# Altium PCB PCB1.PcbDoc
Units mm, origin at the board's own origin, x right, y up, seen from the top; angles counter-clockwise.
Board outline 25.02 x 27.43 mm, 2 copper layers (Top Layer, Bottom Layer); 8 components, 6 nets, 23 pads, 0 vias.
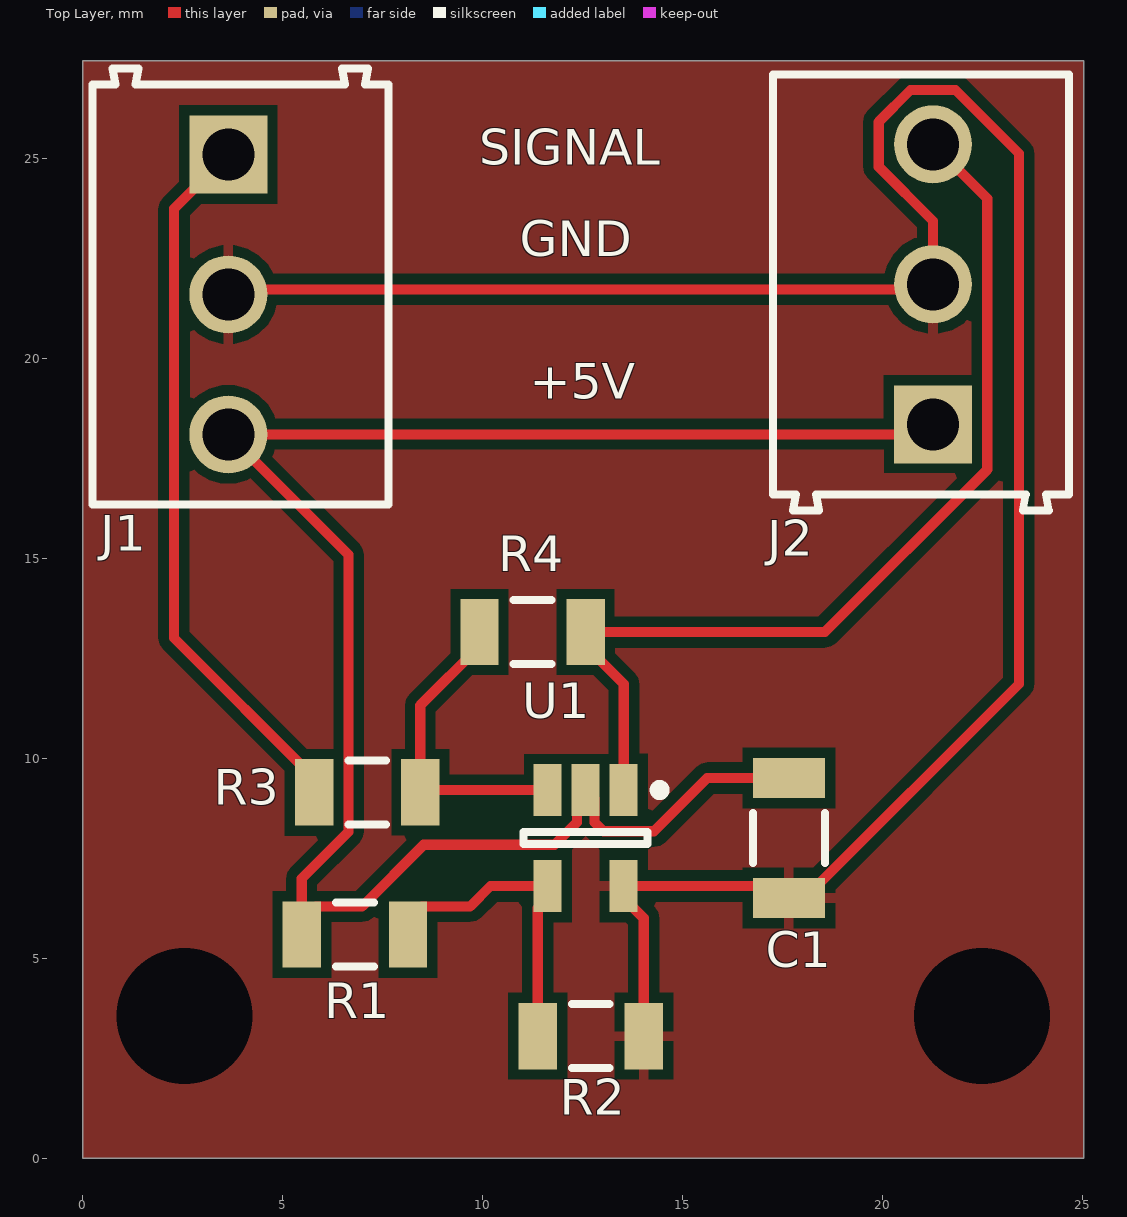
[diagram p0: Top Layer view]
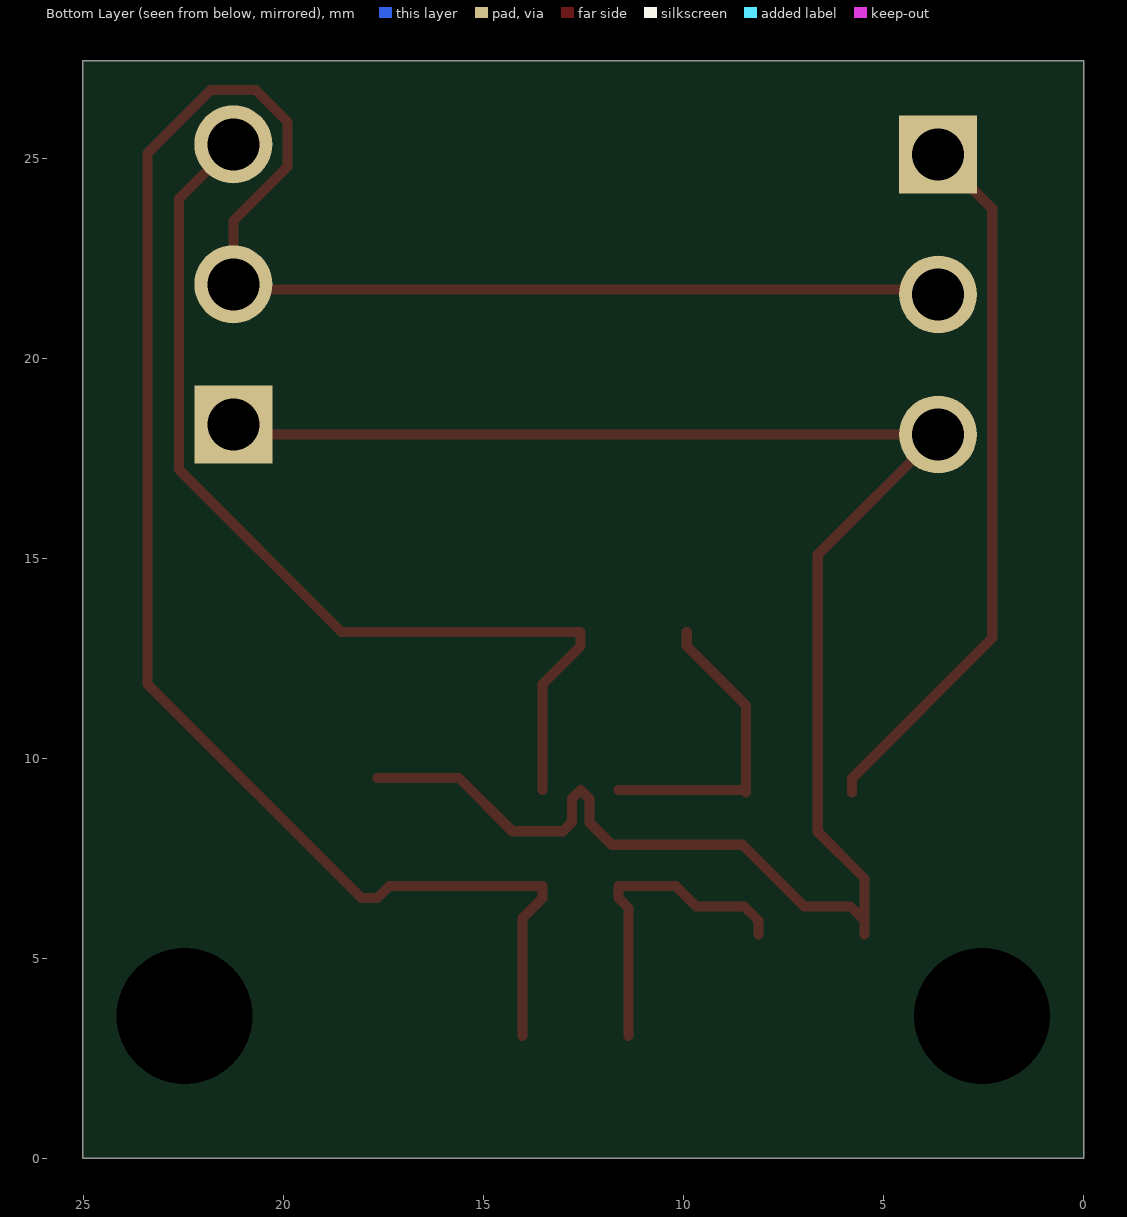
[diagram p1: Bottom Layer view, seen from below]
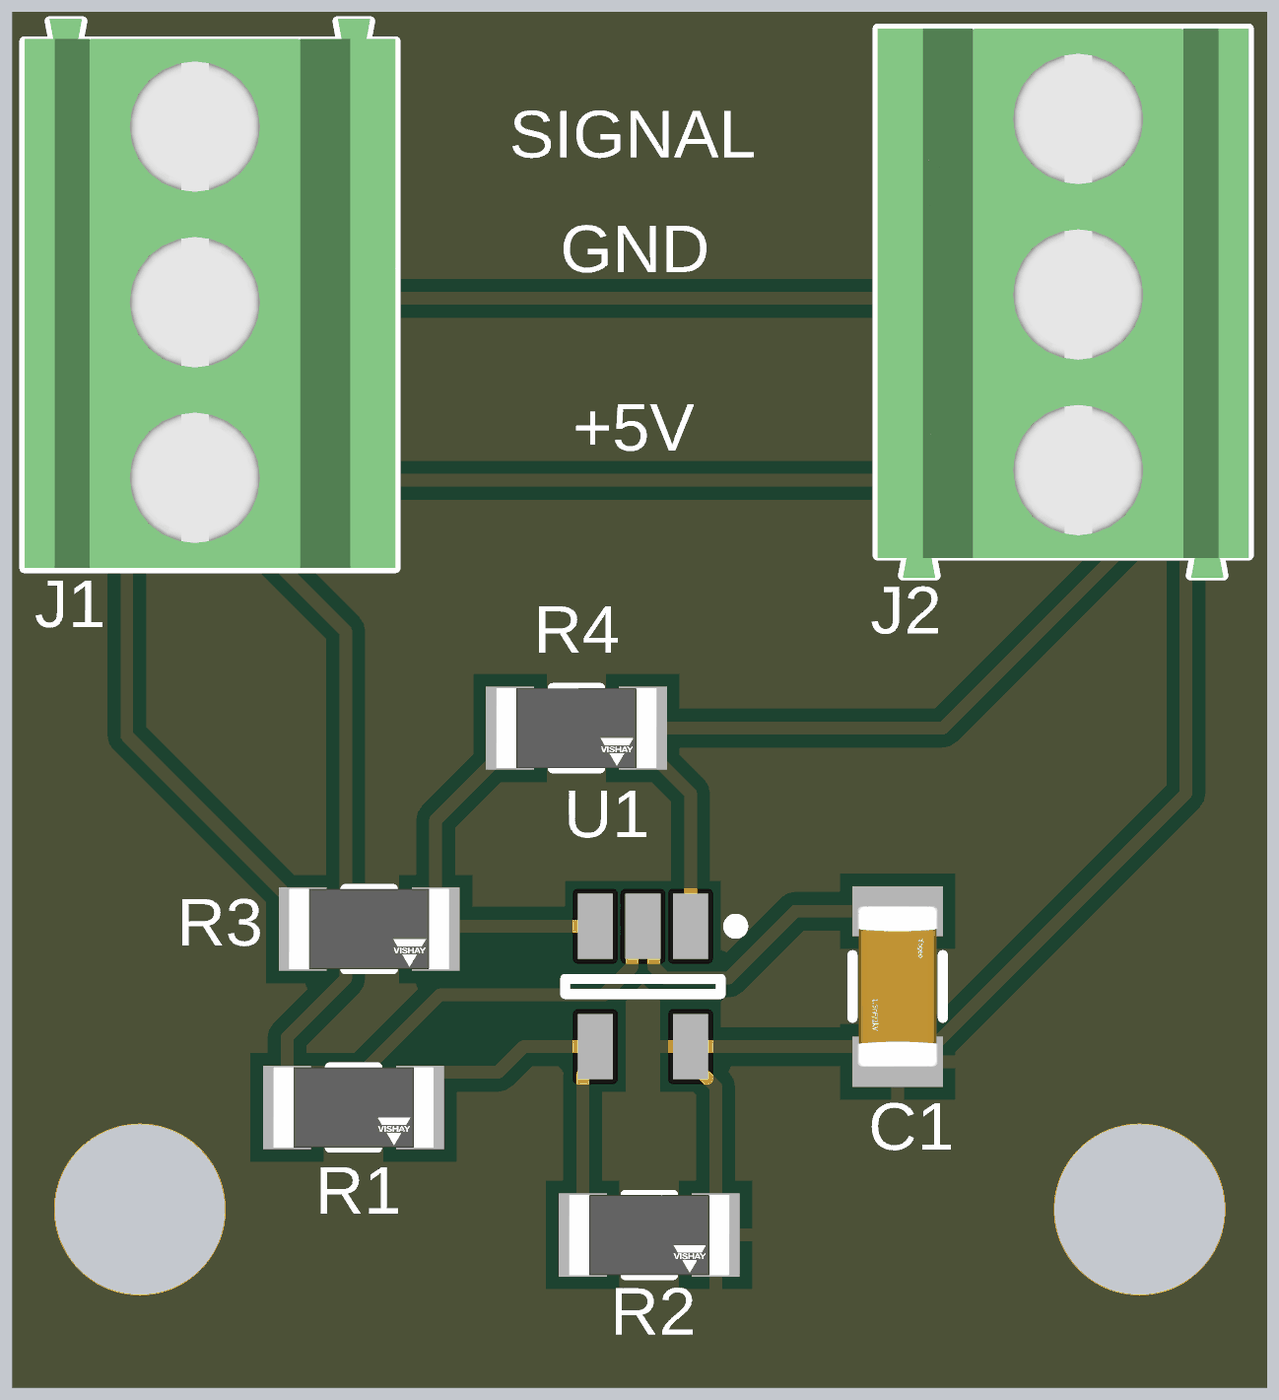
[diagram p2: 3D render of the assembled board from above, using the file's embedded part models]

## Layer stack, top to bottom
Top Solder: solder mask 0.0102, Solder Resist, Dk 3.5
Top Layer: signal copper 0.0356
Dielectric 1: dielectric 0.32, FR-4, Dk 4.8
Bottom Layer: signal copper 0.0356
Bottom Solder: solder mask 0.0102, Solder Resist, Dk 3.5

## Board outline
0,0 25.019,0 25.019,27.432 0,27.432

## Design rules (kind name [scope] priority, off if disabled: settings)
Clearance [All] p1: gap=0.254 ignorepadtopadclearanceinfootprint=FALSE except(0: Arc-Hole Track-Hole SMDPad-Hole THPad-Hole Via-Hole Fill-Hole Poly-Hole Region-Hole Text-Hole)
PolygonConnect [All] p1: connectstyle=Relief reliefconductorwidth=0.254 reliefentries=4 polygonreliefangle="90 Angle" airgapwidth=0.254
RoutingVias [All] p1: holewidth=0.711 width=1.27 viastyle="Through Hole" minholewidth=0.711 minwidth=1.27 maxholewidth=0.711 maxwidth=1.27
SolderMaskExpansion [All] p1: expansion=0.102 istentingtop=FALSE
Width [All] p1: maxlimit=0.254 minlimit=0.254 preferedwidth=0.254
30 further rules are at their usual default settings.

## Components (designator, comment, footprint, x,y, rotation, side; value= is the part's Value field where it differs from the comment)
C1 "10uF" FP-CC1206-1_25-MFG 17.653,8.001 r270 top value="100 nF"
J1 "691214110003" 691214110003 3.937,21.59 r270 top
J2 "691214110003" 691214110003 20.955,21.844 r90 top
R1 "680" FP-CRCW1206-e3-IPC_C 6.802,5.588 r0 top
R2 "1K" FP-CRCW1206-e3-IPC_C 12.7,3.048 r0 top
R3 "1K" FP-CRCW1206-e3-IPC_C 7.112,9.144 r0 top
R4 "10K" FP-CRCW1206-e3-IPC_C 11.247,13.151 r0 top
U1 "MCP6541RT-E/OT" SOT-23-OT5_M 12.573,8.001 r270 top

## Footprints (in the part's own frame and the unit in brackets; to place one, negate y for a bottom-side part, rotate by r counter-clockwise, add the part's x,y. Pads: shape width x height; smd on the part's side, far side on the other; paste and mask are expansions set on the pad)
691214110003 [mm] "3.50 mm Horizontal Entry Modular, 3p"
  rect 1.95x1.95 hole 1.3: 1(-3.5,-0.3)
  round 1.95 hole 1.3: 2(0,-0.3) 3(3.5,-0.3)
  silkscreen extent -5.65,-3.7 5.25,3.7, body extent -5.7,-3.7 5.25,3.7, height 8.55
FP-CC1206-1_25-MFG [mm]
  rect 1x1.8 smd paste+0 mask+0: 1(-1.5,0) 2(1.5,0)
  silkscreen extent -0.63,-0.9 0.63,0.9, body extent -2.2,-1.25 2.2,1.25, height 0.25
FP-CRCW1206-e3-IPC_C [mm]
  rect 0.956x1.658 smd paste+0 mask+0: 1(-1.326,0) 2(1.326,0)
  silkscreen extent -0.47,-0.8 0.47,0.8, body extent -1.9,-0.97 1.9,0.97, height 0.25
SOT-23-OT5_M [mm] "SOT23, 5-Leads, Body 2.9x1.7mm, Pitch 0.95mm, Lead Span 2.8mm, IPC Low Density"
  rect 1.3x0.7 smd: 1(-1.2,0.95) 2(-1.2,0) 3(-1.2,-0.95) 4(1.2,-0.95) 5(1.2,0.95)
  silkscreen extent -1.32,-1.55 0.15,1.98, body extent -0.9,-1.55 0.9,1.55, height 1.45

## Part data
C1: library part CMP-03422-000842-1, "CAP CER 0.1UF 50V X7R 1206", Capacitance="100 nF", Manufacturer=Yageo, Manufacturer Part Number=CC1206KRX7R9BB104, Package=CC1206-1.25, Temperature="-55°C to +125°C", Temperature Characteristic=X7R, Temperature Coefficient=15%, Temperature Range High=+125°C, Temperature Range Low=-55°C, Tolerance=0.1, Voltage Rating="50 V", Automotive=No, Automotive Grade=NA, Category=Cap, ComponentLink2Description=Datasheet, ComponentLink2URL=http://www.yageo.com/documents/recent/UPY-NP0X7R_HV_1KV-to-3KV_11.pdf, Device Class L1="Passive Components", Device Class L2=Capacitors, Device Class L3="Ceramic Capacitors", Digikey Description="CAP CER 0.1UF 50V X7R 1206", Footprint Url=http://www.yageo.com/exep/pages/download/literatures/UPY-C_GEN_24.pdf, Height=1.45mm, Lead Free=Yes, Material=Ceramic, Mouser Description="Multilayer Ceramic Capacitors MLCC - SMD/SMT 100nF 50V X7R 10%", Octopart=https://octopart.com/cc1206krx7r9bb104-yageo-39467816, RoHS=TRUE
J1 J2: library part CMP-1502-02466-1, "Serie 2141 - 3.50 mm Horizontal Entry Modular with Rising Cage Clamp WR-TBL, 3 pin", Manufacturer="Wurth Elektronik", Operating Temperature=-40to105degC, Datasheet URL=http://katalog.we-online.de/em/datasheet/6912141100xx.pdf, Manufacturer URL=http://www.we-online.de, Mounting Technology=THT, Package Reference=691214110003, Packaging=Box, Part Number=691214110003, Pin Number=3, Pitch=3.50mm, Publisher=WurthElektronik
R1 R2 R3 R4: library part CMP-2003-04857-2, "RES Thick Film, 0Ω, 0.25W, 1206", Case Code (Imperial)=1206, Case Code (Metric)=3216, Max Operating Temperature=155°C, Min Operating Temperature=-55°C, Package Quantity=5000, Power Rating=250mW, Resistance=0mR, Temperature Coefficient=100ppm/°C, Tolerance=1%, Voltage Rating=200V, Case/Package=1206, Composition="Thick Film", Contact Plating=Tin, Depth=1.6mm, Height=0.55mm, Lead Free="Lead Free", Length=3.2mm, Military Standard=Not, Mount="Surface Mount", Packaging="Tape and Reel", Radiation Hardening=No, Termination=SMD/SMT, Voltage Rating (DC)=200V, Weight=0.000353oz, Width=1.6mm
U1: library part CMP-0187-00774-2, "None", Case/Package=SOT-23, Input Bias Current=1pA, Input Offset Voltage (Vos)=7mV, Max Operating Temperature=125°C, Max Supply Voltage=5.5V, Min Operating Temperature=-40°C, Min Supply Voltage=1.6V, Natural Thermal Resistance=256°C/W, Package Quantity=3000, Power Supply Rejection Ratio (PSRR)=80dB, Quiescent Current=1uA, Supply Current=600nA, Common Mode Rejection Ratio=70dB, Height=1.3mm, Hysteresis=6.5mV, Lead Free="Lead Free", Length=3.1mm, Max Input Current=1pA, Mount="Surface Mount", Number of Channels=1, Number of Elements=1, Number of Pins=5, Output Compatibility=CMOS, Output Type=TTL, Packaging="Tape and Reel", Propagation Delay=8us, Radiation Hardening=No, REACH SVHC="No SVHC", Response Time=4us, RoHS Compliant=Yes, Technology=CMOS, Type="General Purpose", Width=1.8mm

## Free pads (board coordinates)
  round 1.524 hole 3.4: 1(22.479,3.556) 2(2.54,3.556)

## Nets (pads, with @x,y where several pads share a name; then routed paths per layer and width w, separated by ;. In a path a pad name is that pad's centre, name@x,y a point inside that pad or via, vN(x,y) a via of type N, cw(c..) or ccw(c..) an arc to the next point about the centre after c; other vN are vias at no path point)
+5: C1.1 J1.3 J2.1 R1.1 U1.2 | length 47.2
  Top Layer w0.254: R1.1 R1.1@5.476,5.939 ; C1.1 15.613,9.501 14.282,8.17 13.015,8.17 12.792,8.393 12.792,8.982 U1.2 12.354,8.982 12.354,8.393 11.793,7.832 8.526,7.832 6.984,6.29 5.827,6.29 R1.1@5.476,5.939 ; J2.1 21.001,18.09 J1.3 6.645,15.082 6.645,8.157 5.476,6.988 R1.1@5.476,5.939
GND: C1.2 J1.2 J2.2 pad.1 pad.2 R2.2 U1.5 | length 56.3
  Top Layer w0.254: J1.2 3.764,21.717 21.128,21.717 J2.2 21.255,23.426 19.899,24.782 19.899,25.906 20.693,26.7 21.817,26.7 23.404,25.113 23.404,11.852 18.053,6.501 C1.2 17.353,6.801 U1.5 13.523,6.501 14.026,5.998 R2.2
NetJ1_1: J1.1 R3.1 | length 18
  Top Layer w0.254: J1.1 2.281,23.734 2.281,13 5.786,9.495 R3.1
NetJ2_3: J2.3 R4.2 U1.1 | length 24.8
  Top Layer w0.254: U1.1 13.523,11.85 12.573,12.8 R4.2 18.551,13.151 22.611,17.211 22.611,23.988 J2.3
NetR1_2: R1.2 R2.1 U1.4 | length 8.1
  Top Layer w0.254: R1.2 8.128,5.939 8.479,6.29 9.684,6.29 10.195,6.801 U1.4 11.623,6.501 11.374,6.252 R2.1
NetR3_2: R3.2 R4.1 U1.3 | length 7.8
  Top Layer w0.254: R4.1 9.921,12.8 8.438,11.317 R3.2 8.495,9.201 U1.3

## Polygon pours and split planes (outlines as drawn)
GND on Top Layer "GND_L01_P000" (solid, pour order 0): 0,0 25.019,0 25.019,27.432 0,27.432

## Silkscreen, mask and mechanical layers (free items; w line width, h text height)
Top Overlay:
  text "SIGNAL" at 9.906,24.528 h1.52
  text "GND" at 10.922,22.242 h1.52
  text "+5V" at 11.176,18.686 h1.52